# Altium PCB KC_Input_VAS_v0.2.PcbDoc
Units mil, origin at the board's own origin, x right, y up, seen from the top; angles counter-clockwise.
Board outline 3000 x 1500 mil, 2 copper layers (Top Layer, Bottom Layer); 49 components, 32 nets, 108 pads, 0 vias.
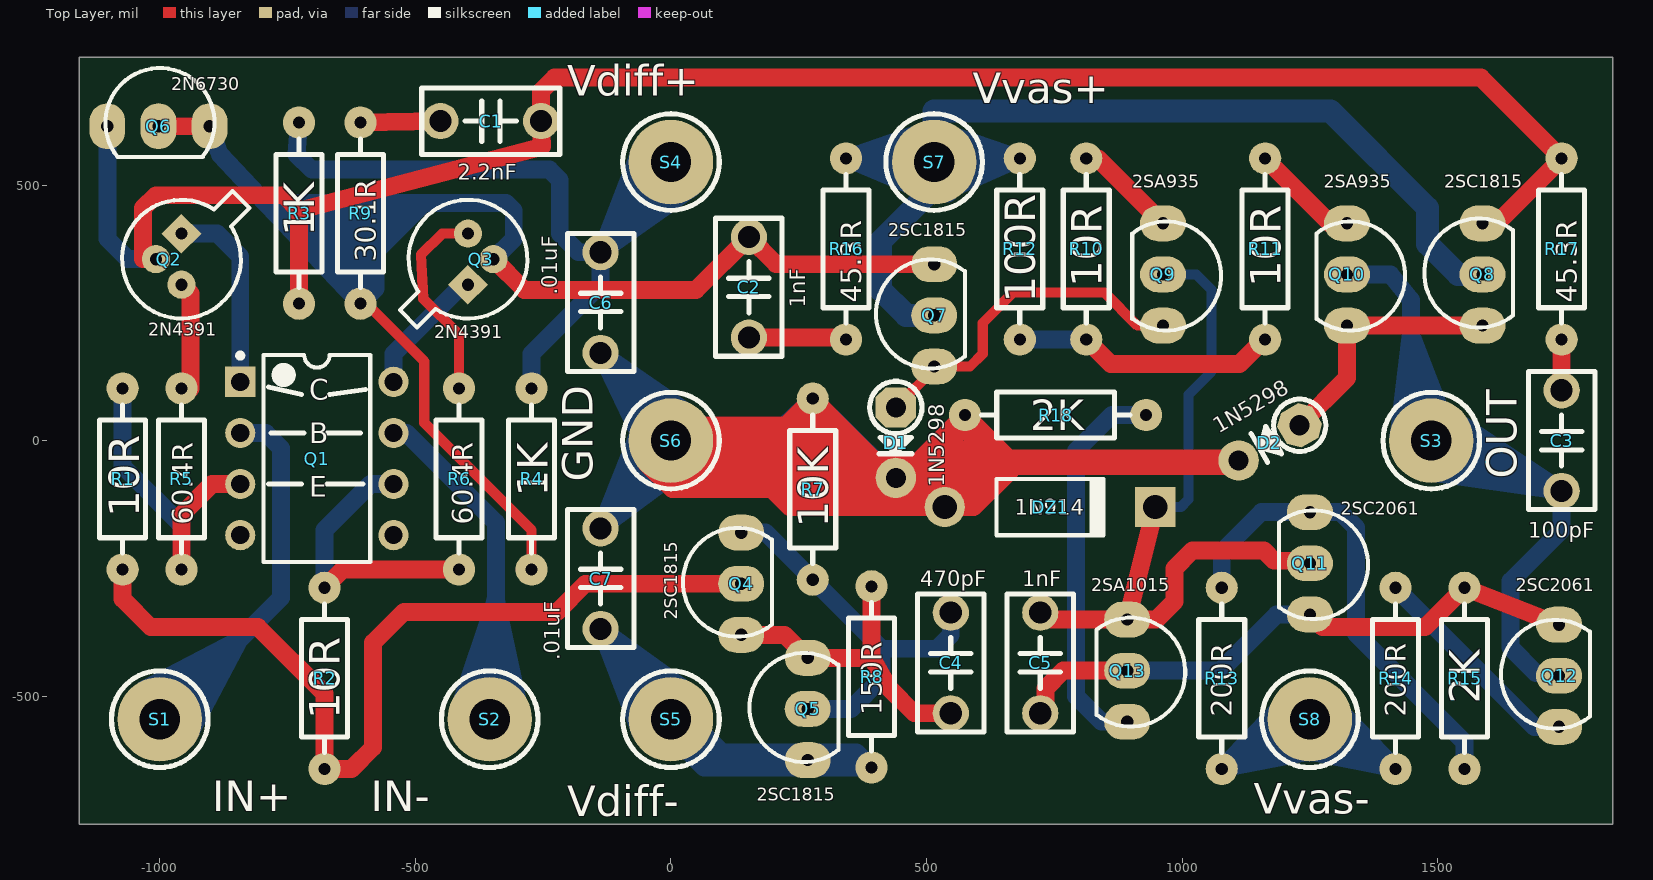
[diagram p0: Top Layer view]
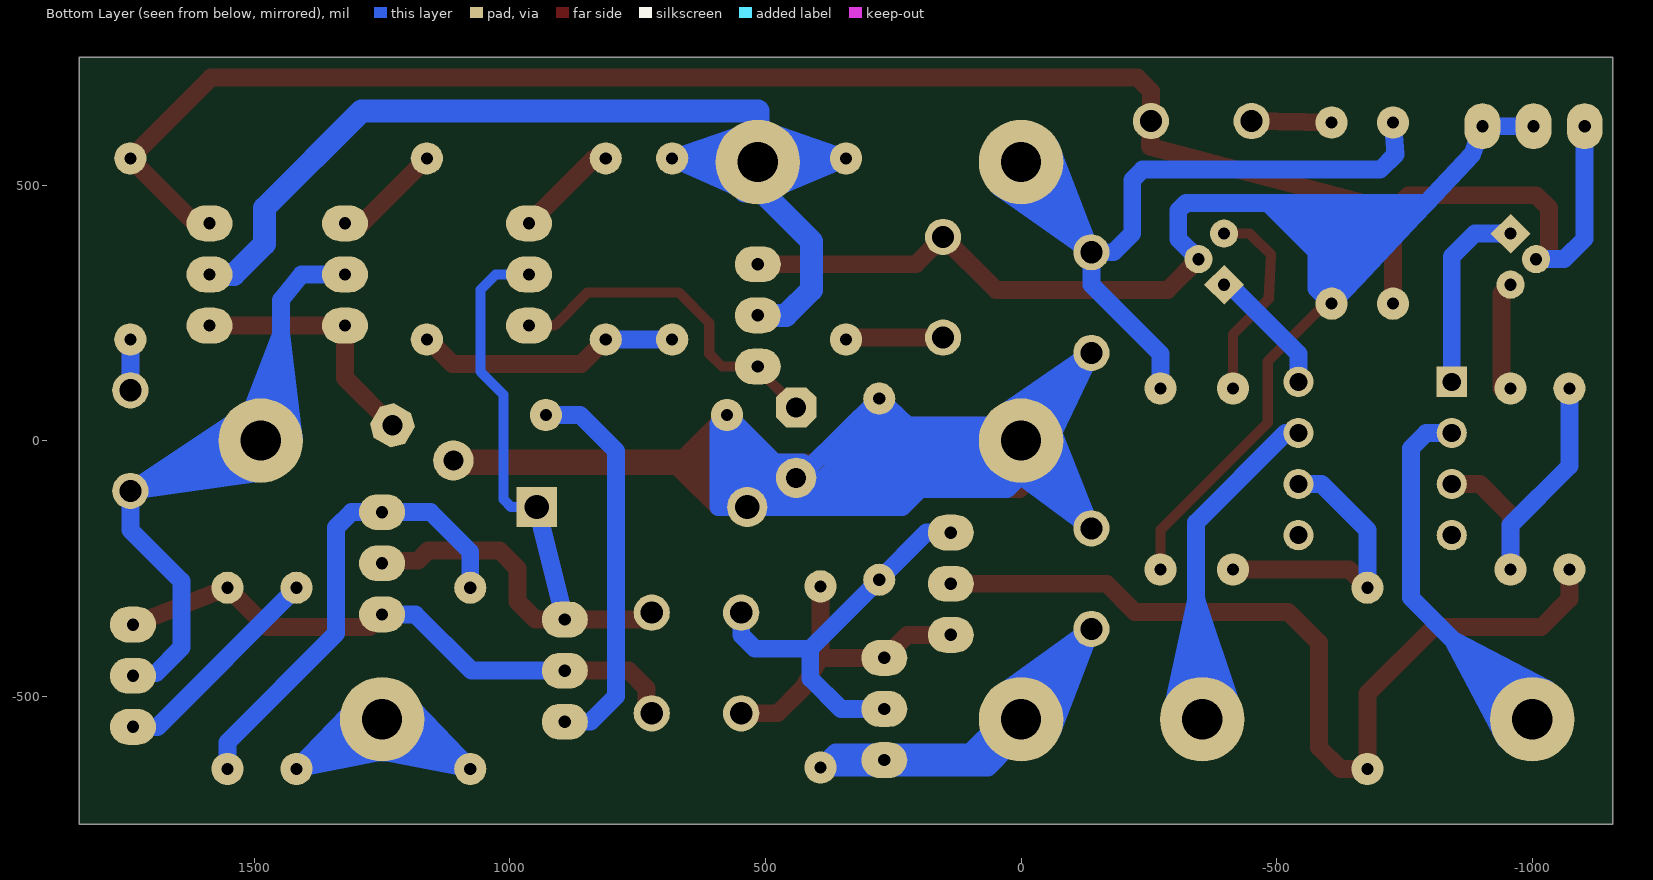
[diagram p1: Bottom Layer view, seen from below]

## Layer stack, top to bottom
Top Solder: solder mask 0.4, Solder Resist, Dk 3.5
Top Layer: signal copper 1.4
Dielectric 1: dielectric 12.6, FR-4, Dk 4.8
Bottom Layer: signal copper 1.4
Bottom Solder: solder mask 0.4, Solder Resist, Dk 3.5

## Board outline
-1157.5,-750 1842.5,-750 1842.5,750 -1157.5,750

## Design rules (kind name [scope] priority, off if disabled: settings)
Clearance [All] p1: gap=10 ignorepadtopadclearanceinfootprint=FALSE except(0: Arc-Hole Track-Hole SMDPad-Hole THPad-Hole Via-Hole Fill-Hole Poly-Hole Region-Hole Text-Hole)
PolygonConnect [All] p1: connectstyle=Relief reliefconductorwidth=10 reliefentries=4 polygonreliefangle="90 Angle" airgapwidth=10
RoomDefinition KC_Input_VAS_Schematic_v0.2 [InComponentClass('KC_Input_VAS_Schematic_v0.2')] p1: confinementstyle=ConfineIn formatcopy=TRUE lockcomponents=FALSE outline 1887.5,-690 12982.5,-690 12982.5,-75 1887.5,-75
RoutingVias [All] p1: holewidth=28 width=50 viastyle="Through Hole" minholewidth=28 minwidth=50 maxholewidth=28 maxwidth=50
SolderMaskExpansion [All] p1: expansion=4
Width [All] p1: maxlimit=50 minlimit=10 preferedwidth=35
30 further rules are at their usual default settings.

## Components (designator, comment, footprint, x,y, rotation, side; value= is the part's Value field where it differs from the comment)
C1 "2.2nF" "CBB 6.3*6.3*5" -352.5,625 r180 top
C2 "1nF" "CBB 6.3*6.3*5" 152.5,300 r90 top
C3 "100pF" "CBB 6.3*6.3*5" 1742.5,0 r90 top
C4 "470pF" "CBB 6.3*6.3*5" 547.5,-435 r270 top
C5 "1nF" "CBB 6.3*6.3*5" 722.5,-435 r270 top
C6 ".01uF" "CBB 6.3*6.3*5" -137.5,270 r270 top
C7 ".01uF" "CBB 6.3*6.3*5" -137.5,-270 r270 top
D1 "1N5298" DO-41V 440,65 r270 top
D2 "1N5298" DO-41V 1230,30 r210 top
DZ1 "1N914" DO-41 741.59,-130 r0 top
Q1 "MAT-02" DIP-8 -692.5,-35 r0 top
Q2 "2N4391" TO-18_SMALLHOLE -957.5,355 r270 top
Q3 "2N4391" TO-18_SMALLHOLE -397,355 r90 top
Q4 "2SC1815" TO92A_SmallHole 137.5,-380 r180 top
Q5 "2SC1815" TO92A_SmallHole 267.5,-625 r180 top
Q6 "2N6730" TO92A_SmallHole -1102.5,615 r90 top
Q7 "2SC1815" TO92A_SmallHole 515,145 r180 top
Q8 "2SC1815" TO92A_SmallHole 1587.5,225 r180 top
Q9 "2SA935" TO92A_SmallHole 962.5,425 r0 top
Q10 "2SA935" TO92A_SmallHole 1322.5,425 r0 top
Q11 "2SC2061" TO92A_SmallHole 1250,-140 r0 top
Q12 "2SC2061" TO92A_SmallHole 1737.5,-560 r180 top
Q13 "2SA1015" TO92A_SmallHole 892.5,-350 r0 top
R1 "10R" "RS 1/4W" -1072.5,-75 r90 top
R2 "10R" "RS 1/4W" -677.5,-465 r90 top
R3 "1K" "RS 1/4W" -727.5,445 r90 top
R4 "1K" "RS 1/4W" -272.5,-75 r90 top
R5 "60.4R" "RS 1/4W" -957.5,-75 r90 top
R6 "60.4R" "RS 1/4W" -414.5,-75 r90 top
R7 "10K" "RS 1/4W" 277.5,-95 r270 top
R8 "150R" "RS 1/4W" 392.5,-462.17 r270 top
R9 "30.1R" "RS 1/4W" -607.5,445 r270 top
R10 "10R" "RS 1/4W" 812.5,375 r270 top
R11 "10R" "RS 1/4W" 1162.5,375 r270 top
R12 "100R" "RS 1/4W" 682.5,375 r90 top
R13 "200R" "RS 1/4W" 1077.5,-465 r90 top
R14 "200R" "RS 1/4W" 1417.5,-465 r90 top
R15 "2K" "RS 1/4W" 1552.5,-465 r270 top
R16 "45.3R" "RS 1/4W" 342.5,375 r90 top
R17 "45.3R" "RS 1/4W" 1742.5,375 r90 top
R18 "2K" "RS 1/4W" 752.5,50 r180 top
S1 "IN+" SCREW-M2-S -1000,-545 r0 top
S2 "IN-" SCREW-M2-S -354.5,-545 r0 top
S3 "OUT" SCREW-M2-S 1487.5,0 r0 top
S4 "Vdiff+" SCREW-M2-S 0,545 r0 top
S5 "Vdiff-" SCREW-M2-S 0,-545 r0 top
S6 "GND" SCREW-M2-S 0,0 r0 top
S7 "Vvas+" Screw-M2-s 515,545 r0 top
S8 "Vvas-" Screw-M2-s 1250,-545 r0 top

## Footprints (in the part's own frame and the unit in brackets; to place one, negate y for a bottom-side part, rotate by r counter-clockwise, add the part's x,y. Pads: shape width x height; smd on the part's side, far side on the other; paste and mask are expansions set on the pad)
"CBB 6.3*6.3*5" [mm] "脚距5mm高6.3mm厚3mm"
  round 1.8 hole 1.1: 1(-2.5,0) 2(2.5,0)
  silkscreen extent -3.43,-1.65 3.43,1.65, body extent -3.15,-1.5 3.15,1.5, height 6.8
DIP-8 [mm] "DIP; 8 Leads; Row Spacing 7.62 mm; Pitch 2.54 mm"
  rect 1.5x1.5 hole 0.9: 1(-3.81,3.81)
  round 1.5 hole 0.9: 2(-3.81,1.27) 3(-3.81,-1.27) 4(-3.81,-3.81) 5(3.81,-3.81) 6(3.81,-1.27) 7(3.81,1.27) 8(3.81,3.81)
  silkscreen extent -3.93,-5.15 2.65,5.23, body extent -3.6,-5.15 3.6,5.15, height 5.08
DO-41 [mm] "Diode, Axial; Body 5.2 x 2.7 mm (LxDia. max), Lead Dia. 0.86 mm (max)"
  round 2 hole 1.2: 1(-5.23,0)
  rect 2x2 hole 1.2: 2(5.23,0)
  silkscreen extent -2.65,-1.4 2.75,1.4
DO-41V [mm] "2.6*3.5mm(直径，脚距）"
  oct 2x2 hole 1: 1(0,0)
  round 2 hole 1: 2(3.5,0)
  silkscreen extent -1.3,-1.3 2.3,1.3, body extent -1.3,-1.3 3.9,1.3, height 6.9
"RS 1/4W" [mm] "直插色环电阻，脚距9mm，直径2.3mm"
  round 1.6 hole 0.6: 1(-4.5,0) 2(4.5,0)
  silkscreen extent -3.68,-1.14 3.68,1.14, body extent -4.72,-1.16 4.73,1.16, height 2.32
SCREW-M2-S [mm]
  round 4.2 hole 2: 1(0,0)
  silkscreen extent -2.4,-2.4 2.4,2.4
Screw-M2-s [mm]
  round 4.2 hole 2: 1(0,0)
  silkscreen extent -2.4,-2.4 2.4,2.4
TO92A_SmallHole [mil]
  oval 90x70 hole 24.02: 1(0,0) 2(0,-100) 3(0,-200)
  silkscreen extent -60,-209 114,4
TO-18_SMALLHOLE [mm] "Can; 3 Leads; Pin Circle Dia. 2.54 mm; Lead Dia. 0.48 mm (max)"
  rect 1.4x1.4 hole 0.61 rot 45: 1(-1.27,0)
  round 1.4 hole 0.61: 2(0,-1.27) 3(1.27,0)
  silkscreen extent -3.39,-2.95 2.95,3.39

## Part data
C1 C2 C3 C4 C5 C6 C7: library part C-CBB, "CBB电容", BOM名称=CBB电容, 学习资源=www.ooocke.com, 版权归属=源创客
D1 D2: library part 1N5xxx, "Current Regulator Diodes"
DZ1: library part 1N4619, "3V/0.5W稳压管", BOM名称=3V/0.5W稳压管, 学习资源=www.ooocke.com, 版权归属=源创客
Q1: "孪生对管-NPN型 40V/20ma"
Q2 Q3: "N沟道JFET开关管 40V/150ma"
Q4 Q5 Q7 Q8: "音频放大-NPN型"
Q6: library part 2N6728/6729/6730, "中功率放大-PNP型"
Q9 Q10: "音频功放-PNP型 50V/500ma"
Q11 Q12: "音频放大-NPN型 50V/500ma"
Q13: "音频放大-PNP型"
R1 R2 R3 R4 R5 R6 R7 R8 R9 R10 R11 R12 R13 R14 R15 R16 R17 R18: library part R-CRR, "直插色环电阻", BOM名称=色环电阻, 学习资源=www.ooocke.com, 版权归属=源创客
S1 S2 S3 S4 S5 S6 S7 S8: library part ScrewConnector, "Screw Connector"

## Nets (pads, with @x,y where several pads share a name; then routed paths per layer and width w, separated by ;. In a path a pad name is that pad's centre, name@x,y a point inside that pad or via, vN(x,y) a via of type N, cw(c..) or ccw(c..) an arc to the next point about the centre after c; other vN are vias at no path point)
GND: C6.2 C7.1 D1.2 D2.2 DZ1.1 R7.1 R18.2 S6.1 | length 13272.8
  Top Layer w20: 122.5,-30 127.5,-30 ; 277.5,-50 267.5,-40 252.5,-40 247.5,-45 252.5,-45 272.5,-65 307.5,-65 272.5,-30 257.5,-30 ; 392.5,-95 387.5,-95 ; D1.2@469.09,-63.41 447.5,-85 417.5,-85 282.5,50 242.5,10 97.5,10 92.5,10 82.5,0 S6.1 68.75,-68.75 75,-75 212.5,-75 247.5,-110 487.5,-110 467.5,-90 402.5,-90 282.5,30 247.5,-5 117.5,-5 112.5,-10 112.5,-45 97.5,-60 222.5,-60 257.5,-95 387.5,-95 ; 522.5,-75 542.5,-75 ; 567.5,-60 567.5,-50 572.5,-45 587.5,-60 572.5,-75 567.5,-75 547.5,-55 542.5,-55 572.5,-25 607.5,-60 ; 602.5,-65 572.5,-95 552.5,-75 542.5,-75 ; 637.5,-59.17 637.5,-55 ; 660.33,-35 622.5,-35 572.5,15 497.5,-60 522.5,-85 542.5,-85 562.5,-105 587.5,-105 632.5,-60 637.5,-55 ; 127.5,-30 257.5,-30 ; 127.5,-30 127.5,-45 232.5,-45 262.5,-75 342.5,-75 ; 127.5,-30 127.5,-20 247.5,-20 272.5,5 287.5,5 387.5,-95 ; 257.5,-30 277.5,-10 342.5,-75 ; 342.5,-75 352.5,-75 362.5,-85 352.5,-85 342.5,-75 ; 542.5,-75 527.5,-60 517.5,-60 567.5,-10 577.5,-10 617.5,-50 637.5,-50 637.5,-55
  Top Layer w35: S6.1@-52.5,-35 ccw(c-40.43,-35) -48.96,-43.54 2.5,-95 197.5,-95 232.5,-130 DZ1.1 ; S6.1@22.5,-75 53.65,-75 ccw(c53.65,-53.65) 68.75,-68.75 ; S6.1@27.5,35 32.5,30 97.5,30 ; 62.5,-75 68.21,-69.29 ccw(c-2.5,1.42) 68.75,-68.75 ; 602.5,-65 632.5,-60 637.5,-59.17 ; 68.75,-68.75 ccw(c-2.5,1.42) 97.5,1.42 97.5,10 97.5,30 ; 97.5,30 225.33,30 R7.1 402.46,-42.8 D1.2@448.48,-42.8 ; D1.2@448.48,-42.8 469.09,-63.41 DZ1.1 ; D1.2@448.48,-42.8 482.54,-42.8 R18.2 660.33,-35 ; DZ1.1 592.5,-130 660.33,-62.17 ; 660.33,-62.17 672.5,-50 1124.7,-50 1109.7,-35 682.5,-35 ; 660.33,-62.17 660.33,-57.17 ; 660.33,-57.17 660.33,-35 ; 660.33,-57.17 682.5,-35 ; 660.33,-35 682.5,-35
  Bottom Layer w35: -82.5,-65 C7.1 ; -77.5,70 C6.2 ; S6.1@-62.5,15 S6.1@-63.02,16.09 ; S6.1@-57.5,30 -59.96,23.8 S6.1@-63.02,16.09 ; S6.1@-52.5,-5 C7.1 ; -47.5,-85 C7.1 ; S6.1@-12.5,55 C6.2 ; S6.1@-2.5,-65 S6.1@0.93,-68.43 ; S6.1@32.5,55 C6.2 ; S6.1@42.5,-60 42.5,-65 72.5,-95 ; S6.1@52.5,-30 S6.1@39.61,-39.61 ; 232.5,30 223.03,30 ; 287.5,-20 227.5,-20 272.5,0 332.5,-45 172.5,-45 191.34,-29.75 ; D1.2@427.5,-65 425.17,-62.72 D1.2@418.52,-56.19 ; C7.1 S6.1 ; C7.1 S6.1@-63.02,16.09 ; C7.1 S6.1@0.93,-68.43 ; C6.2 S6.1 ; C6.2 S6.1@-63.02,16.09 ; S6.1 102.5,30 ; S6.1 167.5,5 120.12,-29.75 ; S6.1 S6.1@21.08,-53.41 ; S6.1 30,30 102.5,30 ; S6.1 S6.1@29.75,-29.75 ; S6.1@0.93,-68.43 27.5,-95 37.5,-95 ; S6.1@0.93,-68.43 S6.1@21.08,-53.41 ; S6.1@21.08,-53.41 33.12,-44.44 S6.1@39.61,-39.61 ; S6.1@21.08,-53.41 37.5,-95 ; S6.1@29.75,-29.75 120.12,-29.75 ; S6.1@29.75,-29.75 S6.1@39.61,-39.61 ; 37.5,-95 72.5,-95 ; S6.1@39.61,-39.61 64.44,-64.44 ; 64.44,-64.44 124.41,-64.44 ; 64.44,-64.44 72.5,-72.5 72.5,-95 ; 72.5,-95 92.5,-95 ; 92.5,-95 124.41,-64.44 ; 92.5,-95 197.5,-95 ; 102.5,30 223.03,30 ; 120.12,-29.75 160.64,-29.75 ; 120.12,-29.75 92.5,-50 129.26,-59.8 ; 124.41,-64.44 146.65,-64.44 ; 124.41,-64.44 129.26,-59.8 ; 129.26,-59.8 160.64,-29.75 ; 129.26,-59.8 146.65,-64.44 ; 146.65,-64.44 167.5,-70 382.5,-70 277.5,40 191.34,-29.75 ; 160.64,-29.75 191.34,-29.75 ; 160.64,-29.75 223.03,30 ; 197.5,-95 232.5,-130 DZ1.1 ; 197.5,-95 392.5,-95 ; 223.03,30 R7.1 416.4,-54.11 D1.2@418.52,-56.19 ; 392.5,-95 417.5,-57.71 D1.2@418.52,-56.19 ; 392.5,-95 507.5,-95 507.5,-61.38 ; D1.2@418.52,-56.19 421.34,-51.99 D1.2@427.5,-42.8 ; D1.2@427.5,-42.8 482.54,-42.8 521.42,-3.92 ; D1.2@427.5,-42.8 446.08,-61.38 507.5,-61.38 ; 507.5,-61.38 535.69,-33.19 DZ1.1@535.69,-106.81 ; 521.42,-3.92 557.5,-40 557.5,-60 570,-72.5 ; 521.42,-3.92 536.42,11.08 ; DZ1.1 592.5,-130 ; DZ1.1 DZ1.1@535.69,-106.81 ; DZ1.1@535.69,-106.81 570,-72.5 ; 536.42,11.08 R18.2 ; 536.42,11.08 575.33,-27.83 ; 570,-72.5 575.33,-77.83 575.33,-112.83 592.5,-130 ; 575.33,-27.83 575.33,-67.17 592.5,-50 ; 575.33,-27.83 R18.2 ; 575.33,-27.83 592.5,-45 ; R18.2 592.5,32.83 592.5,-45 ; 592.5,-130 592.5,-50 ; 592.5,-50 592.5,-45
NetC1_1: C1.1 Q2.2 Q6.1 Q8.3 R3.1 R17.2 | length 3846.8
  Top Layer w35: Q2.2 -1032.5,355 -1032.5,455 -1007.5,480 -757.5,480 -727.5,450 ; R3.1 -727.5,450 ; Q8.3 1615.33,425 R17.2 1584.67,710 -227.5,710 -254.07,683.43 C1.1 -252.5,575 -727.5,450
  Bottom Layer w35: Q6.1 -1102.5,395 -1062.5,355 Q2.2
NetC1_2: C1.2 R9.1 | length 156.6
  Top Layer w35: R9.1 C1.2
NetC2_1: C2.1 R16.1 | length 191.5
  Top Layer w35: C2.1 338.76,201.57 R16.1
NetC2_2: C2.2 Q3.2 Q6.2 Q6.3 Q7.3 R4.1 R9.2 | length 4648.8
  Top Layer w20: R9.2 -595.33,267.83 -482.5,155 -482.5,35 -272.5,-175 R4.1@-272.5,-230.17 ; R4.1@-294.5,-252.17 R4.1@-272.5,-230.17 ; R4.1 R4.1@-272.5,-230.17
  Top Layer w35: Q6.2 Q6.3 ; Q3.2 -287,295 49.07,295 C2.2 205.93,345 Q7.3 Q7.3@525,345
  Bottom Layer w20: -768.73,439.13 -553.37,439.13 ; -702.5,410 -697.5,410 ; -672.5,395 -652.5,395 ; -654.67,317.95 -654.67,347.17 ; -533.37,439.13 -538.37,439.13 ; -697.5,410 -602.5,410 -617.5,395 ; -697.5,410 -662.5,375 ; -662.5,375 -657.5,370 -654.67,372.83 ; -662.5,375 -654.67,375 ; -654.67,347.17 -654.67,372.83 ; -654.67,347.17 -732.5,425 -572.5,425 -602.5,395 ; -654.67,347.17 -607.5,300 -602.5,300 -602.5,375 -538.37,439.13 ; -654.67,372.83 -654.67,375 ; -654.67,372.83 -652.5,375 ; -654.67,375 -654.67,392.83 -652.5,395 ; -654.67,375 -652.5,375 ; -652.5,375 -637.5,375 ; -652.5,375 -632.5,395 ; -652.5,395 -632.5,395 ; -637.5,375 -637.5,340 -617.5,320 -617.5,380 -602.5,395 ; -637.5,375 -617.5,395 ; -632.5,395 -617.5,395 ; -617.5,395 -602.5,395 ; -602.5,395 -597.5,395 -553.37,439.13 ; -553.37,439.13 -538.37,439.13 ; -553.37,439.13 -527.5,465 -527.5,450 -538.37,439.13
  Bottom Layer w35: Q6.2 Q6.3 -882.5,560 -792.5,464.38 ; Q3.2 -307.5,394.5 -307.5,450 -322.5,465 -482.5,465 ; -792.5,464.38 -791.88,465 -527.5,465 -482.5,465 ; -792.5,464.38 -768.73,439.13 -654.67,317.95 R9.2 -577.5,297.83 -577.5,370 -482.5,465
NetC3_1: C3.1 Q10.2 Q12.2 S3.1 | length 2842
  Bottom Layer w35: Q10.2 1407.5,325 1447.5,275 1447.5,210 ; S3.1@1422.5,5 1422.85,7.88 1447.5,210 ; S3.1@1427.5,10 1447.5,210 ; 1447.5,85 1447.5,210 ; S3.1@1467.5,-60 1478.89,-61.59 C3.1 ; S3.1@1477.5,70 1447.5,210 ; S3.1 C3.1 ; S3.1@1512.5,40 1447.5,210 ; S3.1@1512.5,55 1520.59,49.6 C3.1 ; S3.1@1522.5,35 C3.1 ; S3.1@1527.5,-45 C3.1 ; Q12.2 1692.5,-455 1642.5,-405 1642.5,-275 1742.5,-175 C3.1
NetC3_2: C3.2 R17.1 | length 198.8
  Top Layer w35: C3.2 R17.1
  Bottom Layer w35: C3.2 R17.1
NetC4_1: C4.1 Q4.3 Q5.2 R7.2 | length 786.5
  Bottom Layer w35: Q4.3 185.33,-180 R7.2 412.5,-407.17 ; Q5.2 352.5,-525 412.5,-465 412.5,-407.17 ; C4.1 547.5,-380 520.33,-407.17 412.5,-407.17
NetC4_2: C4.2 Q4.1 Q5.3 R8.1 | length 623.2
  Top Layer w35: Q4.1 222.5,-380 Q5.3 392.5,-425 ; R8.1 392.5,-425 ; C4.2 475.93,-533.43 427.5,-485 392.5,-425
NetC5_1: C5.1 DZ1.2 Q9.2 Q11.2 Q13.1 | length 1688.2
  Top Layer w35: C5.1@732.5,-336.57 745.93,-350 Q13.1 ; DZ1.2 Q13.1 ; Q11.2 1245,-235 1180,-235 1160,-215 1020,-215 985,-250 985,-315 950,-350 Q13.1
  Bottom Layer w20: DZ1.2 997.5,-130 1012.5,-115 1012.5,90 1057.5,135 1057.5,295 1027.5,325 Q9.2
  Bottom Layer w35: Q13.1 DZ1.2
NetC5_2: C5.2 Q11.3 Q12.3 Q13.2 R15.1 | length 1169.4
  Top Layer w35: C5.2@732.5,-533.43 732.5,-485 767.5,-450 Q13.2 ; Q11.3 1275,-365 1475.33,-365 R15.1 Q12.3
  Bottom Layer w35: Q13.2 1075,-450 1185,-340 Q11.3
NetC6_1: C6.1 R3.2 R4.2 S4.1 | length 2317.2
  Top Layer w35: S4.1@22.5,495 S4.1@27.5,500 ; S4.1@25,520 S4.1 S4.1@40,585
  Bottom Layer w35: R3.2 -732.5,560 -702.5,530 -237.5,530 -217.5,510 -217.5,405 -180.93,368.43 C6.1 ; R4.2 -272.5,170 -137.5,305 C6.1 ; -77.5,500 C6.1 ; -57.5,480 C6.1 ; S4.1@-57.5,575 -60.1,568.28 C6.1 ; -27.5,465 C6.1 ; S4.1@0,582.5 S4.1 ; S4.1@42.5,495 37.59,491.55 C6.1 ; S4.1@45,500 S4.1 ; S4.1 S4.1@7.17,552.17 ; S4.1 2.5,545 S4.1@9.67,552.17 ; S4.1@7.17,552.17 42.17,587.17 44.67,587.17 S4.1@9.67,552.17 ; S4.1@7.17,552.17 S4.1@9.67,552.17
NetC7_2: C7.2 Q5.1 R8.2 S5.1 | length 2169.9
  Bottom Layer w35: S5.1@-60,-570 -60.65,-568.32 C7.2 ; S5.1@-55,-520 C7.2 ; S5.1@-10,-490 C7.2 ; S5.1@25,-600 64.33,-639.33 R8.2 R8.2@378.17,-625 ; S5.1@40,-495 37.12,-492.95 C7.2 ; S5.1@55,-565 100,-610 363.17,-610 R8.2@378.17,-625 ; C7.2 S5.1 80,-625 Q5.1 R8.2@378.17,-625
NetD1_2: D1.1 Q7.1 Q9.3 | length 677.8
  Top Layer w20: D1.1 520,145 585,145 610,170 610,230 670,290 847.5,290 912.5,225 Q9.3
NetD2_2: D2.1 Q8.1 Q10.3 | length 498.3
  Top Layer w35: D2.1 1322.5,122.5 Q10.3 Q8.1
NetQ1_1: Q1.1 Q2.1 | length 378.6
  Bottom Layer w35: Q2.1 -887.5,405 -842.5,360 Q1.1
NetQ1_2: Q1.2 S1.1 | length 1441.8
  Bottom Layer w35: S1.1@-1027.5,-485 -845,-390 ; S1.1 -845,-390 ; S1.1@-977.5,-470 -845,-390 ; S1.1@-947.5,-585 -942.39,-575.28 -845,-390 ; -917.5,-510 -845,-390 ; Q1.2 -792.5,15 -762.5,-15 -762.5,-307.5 -845,-390
NetQ1_3: Q1.3 R1.2 R5.1 | length 649
  Top Layer w35: R5.1 -957.5,-145 -897.5,-85 Q1.3
  Bottom Layer w35: R1.2 -1072.5,-50 -957.5,-165 R5.1
NetQ1_5: Q1.6 R2.2 R6.1 | length 572.9
  Top Layer w35: R2.2 -641.83,-252.17 R6.1
  Bottom Layer w35: R2.2 -677.5,-175 -587.5,-85 Q1.6 Q1.6@-532.5,-85
NetQ1_6: Q1.7 S2.1 | length 1582.1
  Bottom Layer w35: Q1.7 -517.5,15 -342.5,-160 -342.5,-310 ; S2.1@-412.5,-520 -342.5,-310 ; -377.5,-440 -342.5,-310 ; S2.1@-362.5,-490 -342.5,-310 ; S2.1 -342.5,-533 -342.5,-310 ; -317.5,-455 -342.5,-310 ; S2.1@-292.5,-540 -294.26,-531.9 -342.5,-310
NetQ1_7: Q1.8 Q3.1 | length 256.4
  Bottom Layer w35: Q1.8 -542.5,170 -407.5,305 Q3.1
NetQ2_2: Q2.3 R5.2 | length 210.1
  Top Layer w35: Q2.3 -940,287.5 R5.2@-940,102.17
NetQ3_2: Q3.3 R6.2 | length 399.6
  Top Layer w20: R6.2 -414.5,207.73 -484.31,277.53 -489.08,363.42 -447.5,405 Q3.3
NetQ4_2: Q4.2 R1.1 R2.1 | length 1761.7
  Top Layer w35: R1.1 -1072.5,-310 -1017.5,-365 -807.5,-365 -677.5,-495 R2.1 -624.67,-642.17 -582.5,-600 -582.5,-395 -522.5,-335 -222.5,-335 -167.5,-280 Q4.2
NetQ7_2: Q7.2 Q8.2 R12.2 R16.2 S7.1 | length 3124.1
  Bottom Layer w35: S7.1@460,525 R16.2 ; S7.1@510,610 494.41,604.62 R16.2 ; S7.1@515,480 504.42,484.42 S7.1@493.85,488.85 ; S7.1@515,610 535.05,603.08 R12.2 ; S7.1@520,480 S7.1@526.92,483.08 ; S7.1@525,485 S7.1@526.92,483.08 ; S7.1@541.92,483.08 S7.1@526.92,483.08 ; S7.1@560,525 R12.2 ; R16.2 491.86,489.68 S7.1@493.85,488.85 ; R16.2 507.83,552.17 S7.1 ; S7.1@493.85,488.85 515,510 S7.1 ; S7.1 522.17,552.17 R12.2 ; S7.1@526.92,483.08 539.93,488.85 R12.2
  Bottom Layer w45: Q7.2 460,245 410,295 410,390 504.42,484.42 515,495 S7.1@515,510 ; S7.1 515,610 515,645 1290,645 1480,455 1480,385 1540,325 Q8.2
NetQ9_1: Q9.1 R10.1 | length 202.7
  Top Layer w35: R10.1 835.33,552.17 Q9.1
NetQ10_1: Q10.1 R11.1 | length 212.7
  Top Layer w35: R11.1 1289.67,425 Q10.1
NetQ11_1: Q11.1 R13.2 R15.2 | length 937.5
  Bottom Layer w35: R13.2 1077.5,-217.5 1155,-140 Q11.1 1310,-140 1340,-170 1340,-377.5 1552.5,-590 R15.2
NetQ12_1: Q12.1 R14.2 | length 432.7
  Bottom Layer w35: R14.2 1689.67,-560 Q12.1
NetQ13_3: Q13.3 R18.1 | length 766.9
  Bottom Layer w35: Q13.3 842.5,-550 792.5,-500 792.5,-20 862.5,50 R18.1
NetR10_2: R10.2 R11.2 R12.1 | length 519.6
  Top Layer w35: R10.2 860.33,150 1112.5,150 1160.33,197.83 R11.2
  Bottom Layer w35: R12.1 R10.2
NetR13_1: R13.1 R14.1 S8.1 | length 1357
  Bottom Layer w35: S8.1@1190,-525 R13.1 ; S8.1@1210,-590 R13.1 ; S8.1@1245,-610 R13.1 ; S8.1@1255,-610 R14.1 ; S8.1@1285,-595 R14.1 ; S8.1@1290,-510 R14.1 ; R13.1 S8.1 R14.1
pads on no net: Q1.4 Q1.5

## Silkscreen, mask and mechanical layers (free items; w line width, h text height)
Top Overlay:
  lines w10: -787.5,-85 -722.5,-85 ; -787.5,105 -722.5,90 ; -782.5,15 -717.5,15 ; -672.5,-85 -602.5,-85 ; -672.5,15 -607.5,15 ; -667.5,90 -597.5,100
  text "C" at -707.5,80 h40
  text "B" at -707.5,-5 h40
  text "E" at -707.5,-110 h40
Mechanical 1:
  the board outline again, w10
Drill Drawing:
  the board outline again, w10